# EAGLE board IR PCB  (EAGLE 9.6.2)
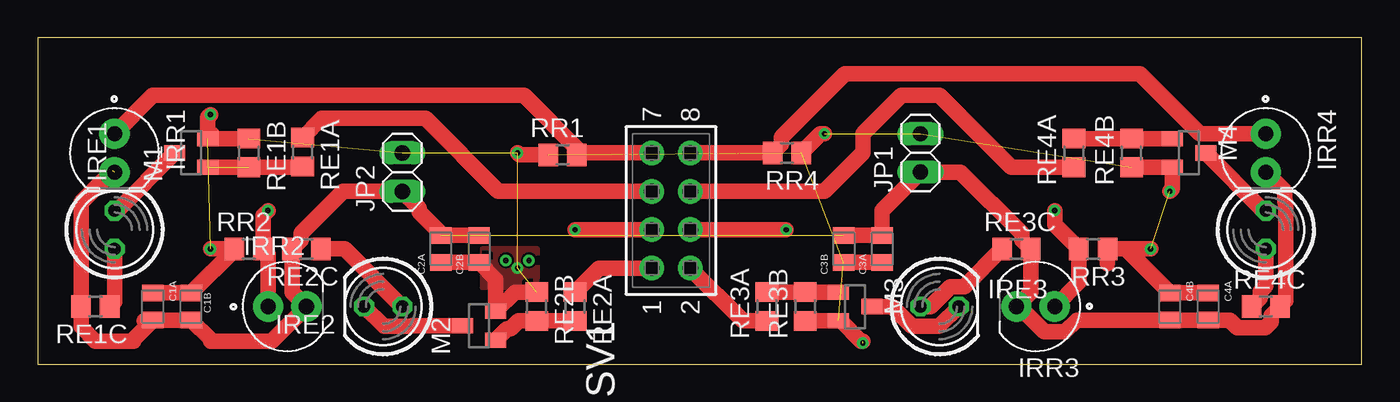
[diagram p0: board, top side]
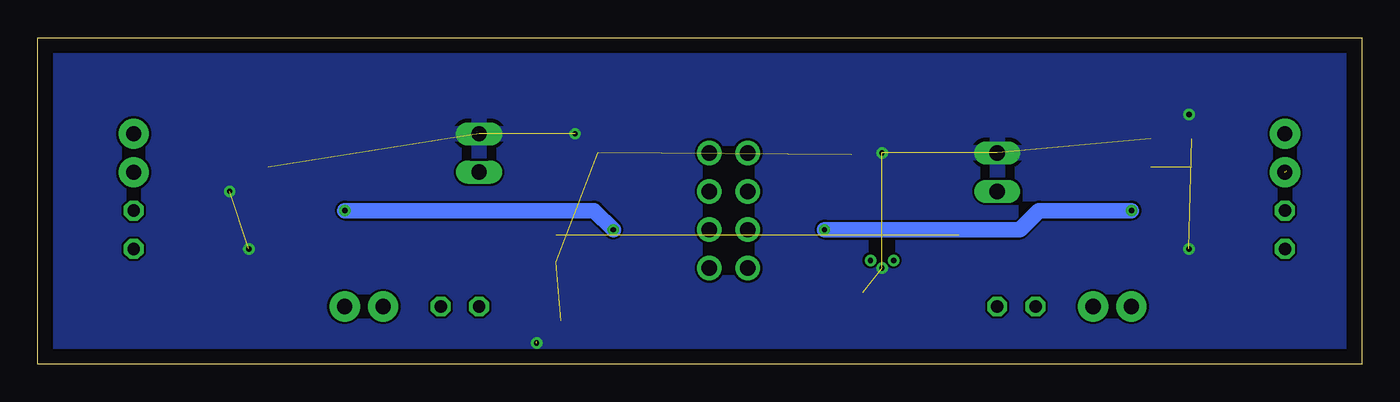
[diagram p1: board, bottom side, seen from below]

Size 87.63 x 21.59 mm. Coordinates in mm from the lower left corner, seen from the top.
Outline: 0,0 87.63,0 87.63,21.59 0,21.59 0,0
Copper layers (1*16): Top 0.035mm / dielectric 1.5mm / Bottom 0.035mm
Design rules "default": minimum track width 6mil, minimum drill 0.35mm, track to track 6mil, track to pad 6mil, pad to pad 6mil, via to via 6mil, smd to smd 6mil, copper to edge 40mil, drill to drill 6mil, minimum pad ring 10mil, minimum via ring 8mil, stop-mask expansion 4mil, vias tented up to drill 0mil, thermal gap 10mil

## Footprints (pad centres in the part's own frame; a part is rotated, then mirrored left to right if it is on the bottom)
CAPC2012X140N = smd 1.08 x 1.42: 1 -0.895,0; 2 0.895,0
LED5MM = drill 0.813 octagon: A -1.27,0; K 1.27,0
XDCR_SFH_313_FA-3/4 = drill 1 pad 2: 1 -1.27,0; 2 1.27,0
1X02 = drill 1.016 long: 1 -1.27,0; 2 1.27,0
SOT23 = smd 1 x 1.4: 1 -0.95,-1.1; 2 0.95,-1.1; 3 0,1.1
R0805 = smd 1.3 x 1.5: 1 -0.95,0; 2 0.95,0
SAMTEC-BCS-104-X-D-TE = drill 1.02 pad 1.62: 1 -3.81,1.27; 2 -3.81,-1.27; 3 -1.27,1.27; 4 -1.27,-1.27; 5 1.27,1.27; 6 1.27,-1.27; 7 3.81,1.27; 8 3.81,-1.27

## Placement (x,y rotation side)
C1A  4.7μF  [CAPC2012X140N]  7.62,3.81 270 top
C1B  0.1μF  [CAPC2012X140N]  10.16,3.81 270 top
C2A  4.7μF  [CAPC2012X140N]  26.67,7.62 90 top
C2B  0.1μF  [CAPC2012X140N]  29.21,7.62 90 top
C3A  4.7μF  [CAPC2012X140N]  55.88,7.62 90 top
C3B  0.1μF  [CAPC2012X140N]  53.34,7.62 90 top
C4A  4.7μF  [CAPC2012X140N]  77.47,3.81 270 top
C4B  0.1μF  [CAPC2012X140N]  74.93,3.81 270 top
IRE1  [LED5MM]  5.08,8.89 90 top
IRE2  [LED5MM]  22.86,3.81 180 top
IRE3  [LED5MM]  59.69,3.81 0 top
IRE4  [LED5MM]  81.28,8.89 90 top
IRR1  SFH_313_FA-3/4  [XDCR_SFH_313_FA-3/4]  5.08,13.97 270 top
IRR2  SFH_313_FA-3/4  [XDCR_SFH_313_FA-3/4]  16.51,3.81 0 top
IRR3  SFH_313_FA-3/4  [XDCR_SFH_313_FA-3/4]  66.04,3.81 180 top
IRR4  SFH_313_FA-3/4  [XDCR_SFH_313_FA-3/4]  81.28,13.97 270 top
JP1  [1X02]  58.42,13.97 90 top
JP2  [1X02]  24.13,12.7 90 top
M1  2N7002  [SOT23]  10.16,13.97 90 top
M2  2N7002  [SOT23]  29.21,2.54 90 top
M3  2N7002  [SOT23]  54.1,3.81 270 top
M4  2N7002  [SOT23]  76.2,13.97 270 top
RE1A  100  [R0805]  17.53,14.03 270 top
RE1B  47K  [R0805]  13.97,13.97 270 top
RE1C  51  [R0805]  3.81,3.81 180 top
RE2A  100  [R0805]  35.56,3.81 270 top
RE2B  47K  [R0805]  33.02,3.81 270 top
RE2C  51  [R0805]  17.78,7.62 180 top
RE3A  100  [R0805]  48.26,3.81 90 top
RE3B  47K  [R0805]  50.8,3.81 90 top
RE3C  51  [R0805]  64.77,7.62 0 top
RE4A  100  [R0805]  68.58,13.97 90 top
RE4B  47K  [R0805]  72.39,13.97 90 top
RE4C  51  [R0805]  81.28,3.81 0 top
RR1  1.8K  [R0805]  34.74,13.84 0 top
RR2  1.8K  [R0805]  13.97,7.62 0 top
RR3  1.8K  [R0805]  69.85,7.62 180 top
RR4  1.8K  [R0805]  49.59,13.97 180 top
SV1  SAMTEC-BCS-104-X-D-TEJ  [SAMTEC-BCS-104-X-D-TE]  41.91,10.16 90 top

## Library data of the parts
C1A C1B C2A C2B C3A C3B C4A C4B = GRM21BR71A106KA73L; DESCRIPTION: SMD capacitor X7R(EIA) with capacitance 10uF Tol.10%. Rated voltage 10Vdc 125C; DIGI-KEY_PART_NUMBER: 490-10516-1-ND; MF: Murata Electronics; MP: GRM21BR71A106KA73L; PACKAGE: 2012 Murata; PURCHASE-URL: https://pricing.snapeda.com/search/part/GRM21BR71A106KA73L/?ref=eda
IRE1-IRE4 = led
IRR1-IRR4 = SFH_313_FA-3_4; AVAILABILITY: Unavailable; DESCRIPTION: Phototransistors 870nm Top View Radial - 2 Leads; MF: OSRAM Opto; MP: SFH 313 FA-3/4; PACKAGE: Radial-2 Osram Opto; PRICE: None
JP1 JP2 = pinhead
M1-M4 = 2N7002; AVAILABILITY: Good; DESCRIPTION: N-Channel 60V 260mA (Ta) 300mW (Tj) Surface Mount SOT-23-3 (TO-236); MF: ON Semiconductor; MP: 2N7002; PACKAGE: SOT-23-3 ON Semiconductor; PRICE: None; PURCHASE-URL: https://pricing.snapeda.com/search/part/2N7002/?ref=eda
RE1A RE1B RE1C RE2A RE2B RE2C RE3A RE3B RE3C RE4A RE4B RE4C RR1-RR4 = rcl; SPICEPREFIX: R
SV1 = SAMTEC-BCS-104-X-D-TE; AVAILABILITY: Bad; DESCRIPTION: 8 Position Receptacle Connector Through Hole; MF: Samtec; MP: BCS-104-T-D-TE; PACKAGE: None; PRICE: None; PURCHASE-URL: https://pricing.snapeda.com/search/part/BCS-104-T-D-TE/?ref=eda

## Nets
GND: C1A.1 C1B.1 C2A.1 C2B.1 C3A.1 C3B.1 C4A.1 C4B.1 JP1.2 JP2.2 M1.2 M2.2 M3.2 M4.2 RE1B.1 RE2B.1 RE3B.1 RE4B.1 RR1.1 RR2.1 RR3.1 RR4.1
N$1: M1.1 RE1A.2 RE1B.2
N$2: IRE1.A RE1C.1
N$3: M2.1 RE2A.2 RE2B.2
N$4: IRE2.A RE2C.1
N$5: IRE1.K M1.3
N$6: IRE2.K M2.3
N$7: M3.1 RE3A.2 RE3B.2
N$8: IRE3.A RE3C.1
N$9: IRE3.K M3.3
N$10: M4.1 RE4A.2 RE4B.2
N$11: IRE4.A RE4C.1
N$12: IRE4.K M4.3
PE1: RE1A.1 SV1.5
PE2: RE2A.1 SV1.1
PE3: RE3A.1 SV1.2
PE4: RE4A.1 SV1.6
PR1: IRR1.1 RR1.2 SV1.7
PR2: IRR2.1 RR2.2 SV1.3
PR3: IRR3.1 RR3.2 SV1.4
PR4: IRR4.1 RR4.2 SV1.8
VCC: C1A.2 C1B.2 C2A.2 C2B.2 C3A.2 C3B.2 C4A.2 C4B.2 IRR1.2 IRR2.2 IRR3.2 IRR4.2 JP1.1 JP2.1 RE1C.2 RE2C.2 RE3C.2 RE4C.2

## Tracks (layer width: path | path; a pad name or v marks a point on that pad's centre or on a via)
GND  (via drill 0.35)  (12 unrouted)
  Top 1.016: RE1B.1 M1.2 | M2.2 30.47,3.65 | C1A.1 C1B.1 | C1B.1 10.54,5.08 | C2A.1 C2B.1 30.31,5.62 M2.2 | 11.56,15.22 M1.2 | C1B.1 13.02,7.57 RR2.1 v11.43,7.62 | M1.2 11.26,16.34 v11.43,16.51 | RE3B.1 M3.2 53.14,2.86 54.48,1.52 54.61,1.52 | C3B.1 C3A.1 | RR3.1 70.8,6.65 | RE4B.1 M4.2 75.1,11.6 v74.93,11.43 | RR3.1 72.02,7.62 C4B.1 C4A.1 | RR3.1 v73.66,7.62 | M2.2 31.58,4.76 RE2B.1 | RR1.1 31.88,13.84 v31.75,13.97 | RR4.1 51.81,15.24 v52.07,15.24
  other vias: 31.75,6.35 54.61,1.39
  pour Bottom: 0,21.59 0,0 87.63,0 87.63,21.59
  pour Top: 33.02,7.62 33.02,5.08 29.46,5.08 29.46,7.62
N$1  (1 unrouted)
  Top 1.016: RE1A.2 17.46,13.02 M1.1
N$2
  Top 1.016: RE1C.1 5.08,4.13 IRE1.A
N$3
  Top 1.016: RE2A.2 RE2B.2 31.81,2.86 31.28,2.33 31.05,2.33 M2.1
N$4
  Top 1.016: RE2C.1 20.32,7.62 IRE2.A
N$5
  Top 1.016: M1.3 5.25,10.16 IRE1.K
N$6
  Top 1.016: M2.3 24.73,2.54 24.68,2.49 22.91,2.49 IRE2.K
N$7
  Top 1.016: RE3A.2 RE3B.2 M3.1
N$8
  Top 1.016: RE3C.1 61.33,5.13 60.41,5.13 59.09,3.81 IRE3.A
N$9
  Top 1.016: M3.3 56.55,3.81 57.87,2.49 59.64,2.49 IRE3.K
N$10
  Top 1.016: RE4A.2 RE4B.2 M4.1
N$11
  Top 1.016: IRE4.A 81.28,5.19 80.92,4.83 80.92,4.4 RE4C.1
N$12
  Top 1.016: M4.3 81.11,10.16 IRE4.K
N$13  (via drill 0.35)
  other vias: 32.51,6.86
N$14  (via drill 0.35)
  other vias: 30.99,6.86
PE1
  Top 1.016: RE1A.1 18.8,16.25 25.66,16.25 30.48,11.43 SV1.5
PE2
  Top 1.016: SV1.1 37.15,6.35 RE2A.1
PE3
  Top 1.016: SV1.2 46.67,2.86 RE3A.1
PE4
  Top 1.016: RE4A.1 64.45,13.02 59.69,17.78 57.15,17.78 54.61,15.24 54.61,13.97 52.07,11.43 SV1.6
PR1
  Top 1.016: RR1.2 35.81,13.97 SV1.7 | 35.56,13.97 RR1.2 | IRR1.1 7.62,17.78 32.18,17.78 35.9,14.06 RR1.2
PR2  (via drill 0.35)
  Top 1.016: RR2.2 15.24,7.3 IRR2.1 | RR2.2 14.92,8.89 | RR2.2 14.92,9.84 v15.24,10.16 | SV1.3 v35.56,8.89
  Bottom 1.016: v15.24,10.16 21.36,10.16 22.63,8.89 v35.56,8.89
PR3  (via drill 0.35)
  Top 1.016: IRR3.1 68.9,5.4 RR3.2 67.31,9.21 v67.31,10.16 | v49.53,8.89 SV1.4
  Bottom 1.016: v67.31,10.16 50.8,10.16 v49.53,8.89
PR4
  Top 1.016: SV1.8 RR4.2 49.23,14.56 49.23,14.99 53.44,19.2 72.95,19.2 76.91,15.24 IRR4.1
VCC  (2 unrouted)
  Top 1.016: 7.04,2.86 C1A.2 | C1A.2 C1B.2 11.43,1.65 11.43,1.52 15.49,1.52 IRR2.2 16.83,4.76 RE2C.2 17.42,8.21 17.42,8.64 20.21,11.43 JP2.1 25.25,10.31 25.25,10.08 26.67,8.66 C2A.2 C2B.2 | 4.97,12.81 2.86,10.69 RE1C.2 2.86,2.47 3.81,1.52 6.35,1.52 6.35,1.65 C1A.2 | C3B.2 C3A.2 55.88,10.16 JP1.1 61.07,12.7 65.13,8.64 65.13,8.21 RE3C.2 65.72,4.76 IRR3.2 64.96,3.81 66.62,2.15 68,2.15 68.76,2.92 C4B.2 C4A.2 78.89,2.92 79.41,2.4 81.25,2.4 81.64,2.79 81.64,3.22 RE4C.2 82.6,4.18 82.6,10.71 82.55,10.76 82.55,11.43 IRR4.2